# Altium PCB Transmitter.PcbDoc
Units mil, origin at the board's own origin, x right, y up, seen from the top; angles counter-clockwise.
Board outline 6000 x 4000 mil, 2 copper layers (Top Layer, Bottom Layer); 6 components, 6 nets, 61 pads, 0 vias.
Unrouted connection lines stored in the file: 1.
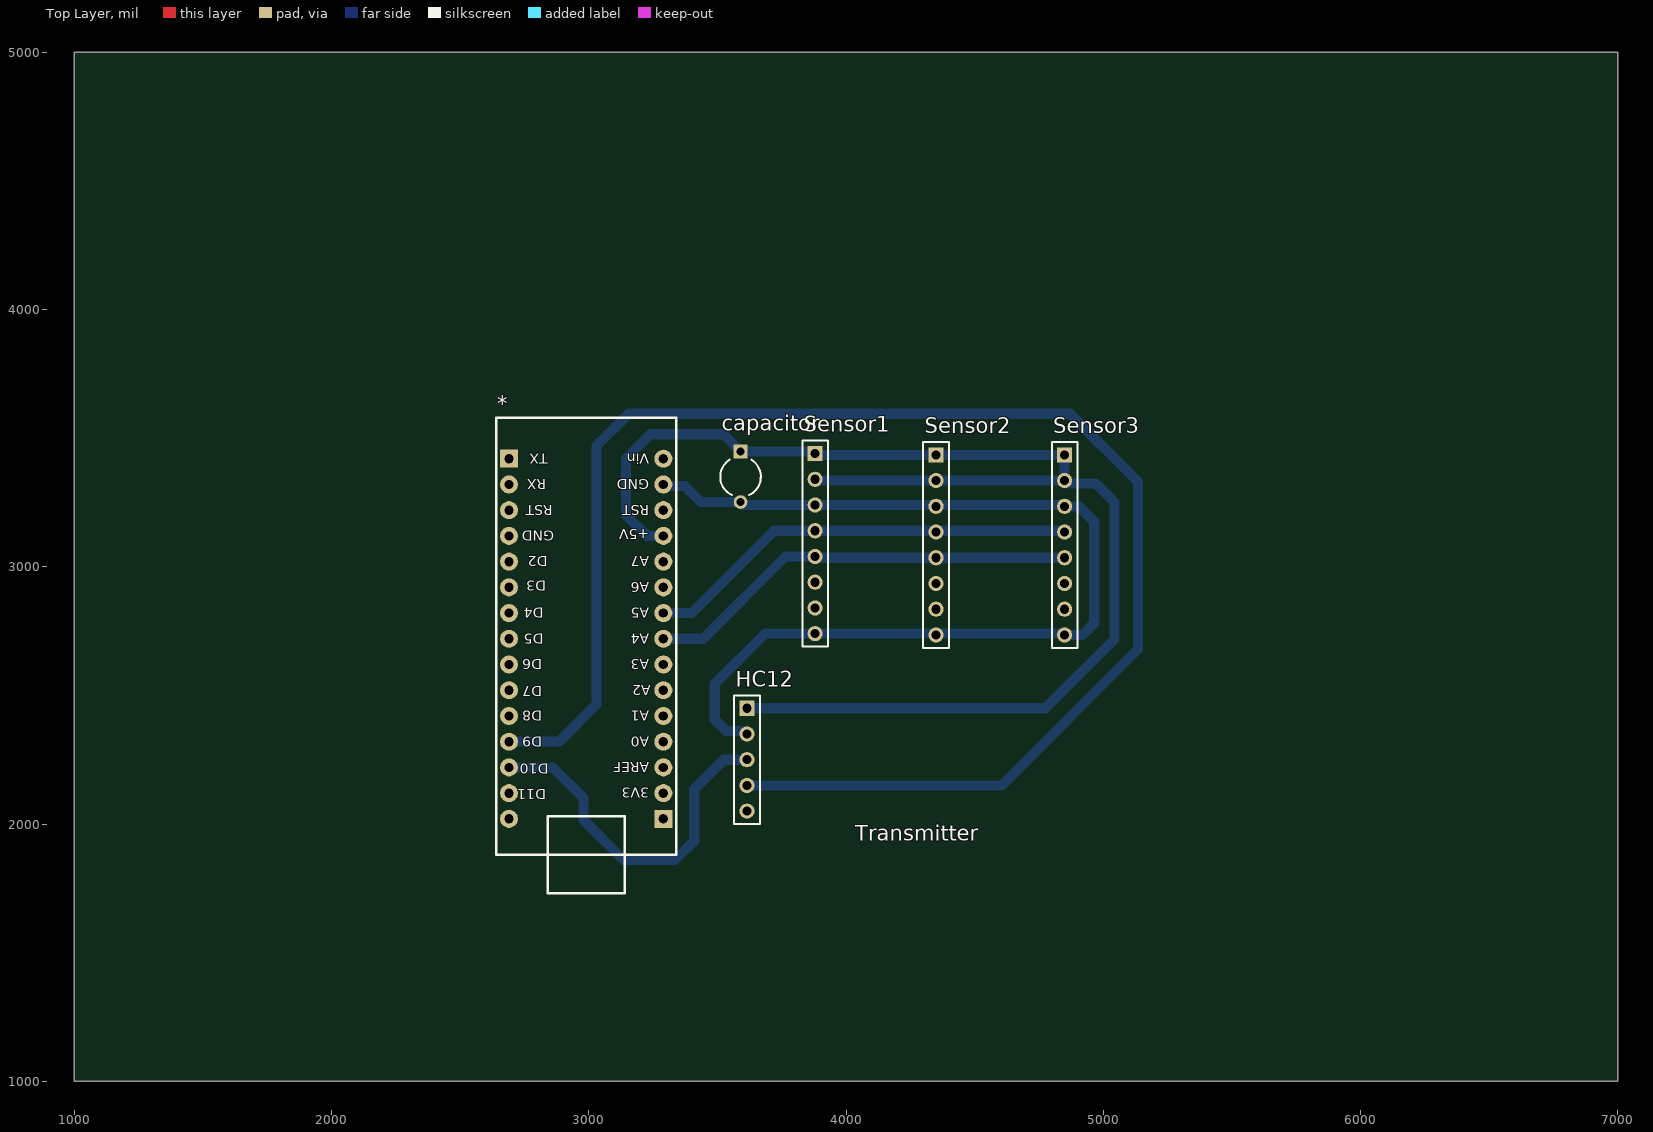
[diagram p0: Top Layer view]
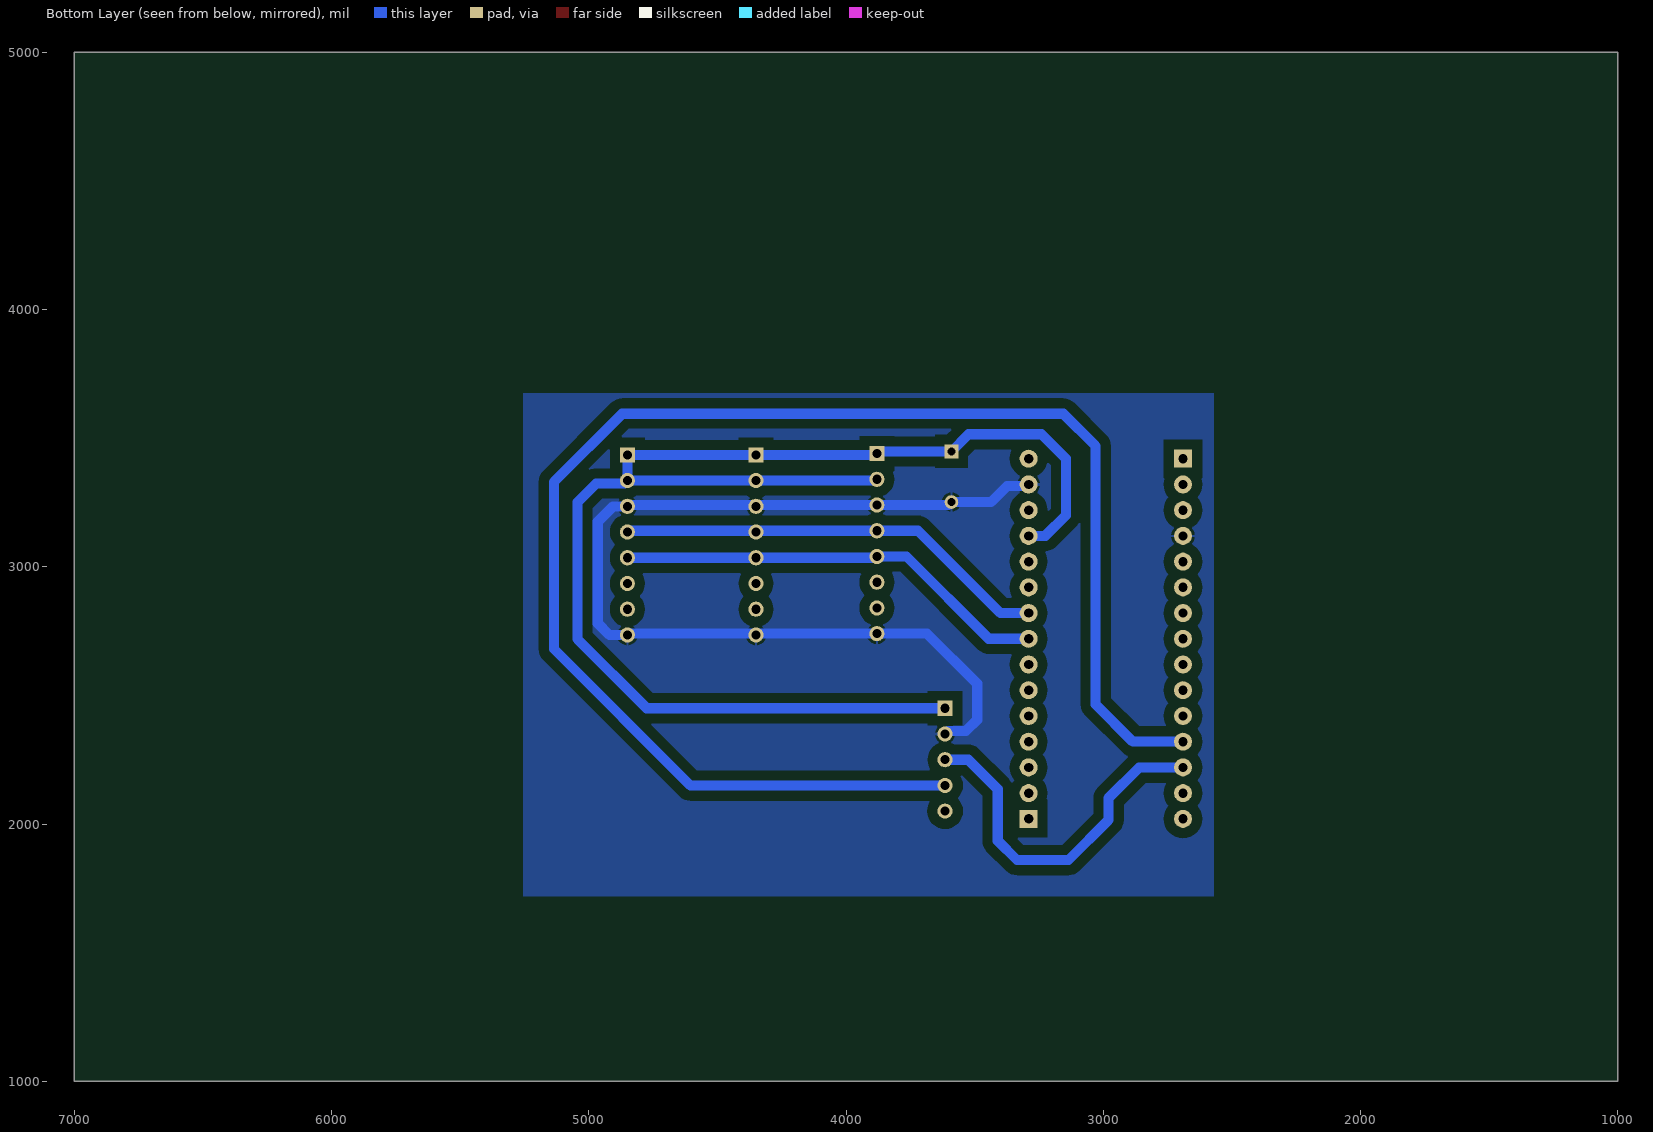
[diagram p1: Bottom Layer view, seen from below]

## Layer stack, top to bottom
Top Solder: solder mask 0.4, Solder Resist, Dk 3.5
Top Layer: signal copper 1.4
Dielectric 1: dielectric 12.6, FR-4, Dk 4.8
Bottom Layer: signal copper 1.4
Bottom Solder: solder mask 0.4, Solder Resist, Dk 3.5

## Board outline
1000,1000 7000,1000 7000,5000 1000,5000

## Design rules (kind name [scope] priority, off if disabled: settings)
Clearance [All] p1: gap=39.37
PolygonConnect [All] p1: connectstyle=Relief reliefconductorwidth=10 reliefentries=4 polygonreliefangle="90 Angle" airgapwidth=10
RoomDefinition Transmitter [InComponentClass('Transmitter')] p1: confinementstyle=ConfineIn formatcopy=TRUE lockcomponents=FALSE outline 2570,1720 5255,1720 5255,3675 2570,3675
RoutingVias [All] p1: holewidth=28 width=50 viastyle="Through Hole" minholewidth=28 minwidth=50 maxholewidth=28 maxwidth=50
SolderMaskExpansion [All] p1: expansion=4
UnpouredPolygon [All] p1: allowunpoured=FALSE
Width [All] p1: maxlimit=39.37 minlimit=39.37 preferedwidth=39.37
29 further rules are at their usual default settings.

## Components (designator, comment, footprint, x,y, rotation, side; value= is the part's Value field where it differs from the comment)
* "Nano" ArduinoNano 3290,2120 r90 top
capacitor "Cap2" CAPR5-4X5 3590,3350 r270 top
HC12 "Header 5" HDR1X5 3615,2450 r270 top
Sensor1 "Header 8" HDR1X8 3880,3440 r270 top
Sensor2 "Header 8" HDR1X8 4350,3435 r270 top
Sensor3 "Header 8" HDR1X8 4850,3435 r270 top

## Footprints (in the part's own frame and the unit in brackets; to place one, negate y for a bottom-side part, rotate by r counter-clockwise, add the part's x,y. Pads: shape width x height; smd on the part's side, far side on the other; paste and mask are expansions set on the pad)
ArduinoNano [mil]
  rect 70x70 hole 36: 0(-100,0) 15(1300,600)
  round 70 hole 36: 1(0,0) 2(100,0) 3(200,0) 4(300,0) 5(400,0) 6(500,0) 7(600,0) 8(700,0) 9(800,0) 10(900,0) 11(1000,0) 12(1100,0) 13(1200,0) 14(1300,0) 16(1200,600) 17(1100,600) 18(1000,600) 19(900,600) 20(800,600) 21(700,600) 22(600,600) 23(500,600) 24(400,600) 25(300,600) 26(200,600) 27(100,600) 28(0,600) 29(-100,600)
  silkscreen extent -390,-50 1460,650
CAPR5-4X5 [mm] "Capacitor; 2 Leads"
  rect 1.35x1.35 hole 0.8: 1(-2.5,0)
  round 1.35 hole 0.8: 2(2.5,0)
  silkscreen extent -1.69,-2 1.82,2
HDR1X5 [mm] "Connector; Header; 5 Position"
  rect 1.5x1.5 hole 0.9: 1(0,0)
  round 1.5 hole 0.9: 2(2.54,0) 3(5.08,0) 4(7.62,0) 5(10.16,0)
  silkscreen extent -1.27,-1.27 11.43,1.27
HDR1X8 [mm] "Connector; Header; 8 Position"
  rect 1.5x1.5 hole 0.9: 1(0,0)
  round 1.5 hole 0.9: 2(2.54,0) 3(5.08,0) 4(7.62,0) 5(10.16,0) 6(12.7,0) 7(15.24,0) 8(17.78,0)
  silkscreen extent -1.27,-1.27 19.05,1.27

## Part data
*: library part Component_1
capacitor: "Capacitor"
HC12: "Header, 5-Pin"
Sensor1 Sensor2 Sensor3: "Header, 8-Pin"

## Nets (pads, with @x,y where several pads share a name; then routed paths per layer and width w, separated by ;. In a path a pad name is that pad's centre, name@x,y a point inside that pad or via, vN(x,y) a via of type N, cw(c..) or ccw(c..) an arc to the next point about the centre after c; other vN are vias at no path point)
GND: *.13 *.18 capacitor.2 HC12.2 Sensor1.3 Sensor1.8 Sensor2.3 Sensor2.8 Sensor3.3 Sensor3.8 | length 3946.1
  Bottom Layer w39.37: *.13@3295.94,3314.06 3373.28,3314.06 3435.76,3251.57 capacitor.2 ; capacitor.2@3601.57,3240 Sensor1.3 4845,3240 Sensor3.3 4905,3235 4965,3175 4965,2780 4920,2735 Sensor3.8 ; HC12.2@3603.58,2361.42 3533.99,2361.42 3490,2405.4 3490,2545 3685,2740 Sensor1.8 Sensor3.8@4845,2740
RX: *.27 HC12.3 | length 1402.6
  Bottom Layer w39.37: *.27 2860,2220 2980,2100 2980,2015 3135,1860 3335,1860 3410,1935 3410,2135 3525,2250 HC12.3
SCL: *.8 Sensor1.4 Sensor2.4 Sensor3.4 | length 1694.6
  Bottom Layer w39.37: *.8 3400,2820 3720,3140 Sensor1.4 4845,3140 Sensor3.4
SDA: *.7 Sensor1.5 Sensor2.5 Sensor3.5 | length 1694.6
  Bottom Layer w39.37: *.7 3445,2720 3765,3040 Sensor1.5 3885,3035 Sensor2.5 Sensor3.5
TX: *.26 HC12.4 | length 6061.1
  Bottom Layer w39.37: *.26 2885,2320 3030,2465 3030,3470 3155,3595 4870,3595 5135,3330 5135,2680 4605,2150 HC12.4
VCC: *.11 capacitor.1 HC12.1 Sensor1.1 Sensor1.2 Sensor2.1 Sensor2.2 Sensor3.1 Sensor3.2 | length 5525.5
  Bottom Layer w39.37: *.11 3225,3120 3145,3200 3145,3420 3240,3515 3523.43,3515 capacitor.1 3871.57,3448.43 Sensor1.1 3885,3435 Sensor2.1 Sensor3.1 Sensor3.2 Sensor2.2 Sensor1.2@3885,3335 ; HC12.1 4775,2450 5043.74,2718.74 5043.74,3251.26 4971.42,3323.58 Sensor3.2@4861.42,3323.58
pads on no net: *.0 *.1 *.2 *.3 *.4 *.5 *.6 *.9 *.10 *.12 *.14 *.15 *.16 *.17 *.19 *.20 *.21 *.22 *.23 *.24 *.25 *.28 *.29 HC12.5 Sensor1.6 Sensor1.7 Sensor2.6 Sensor2.7 Sensor3.6 Sensor3.7

## Polygon pours and split planes (outlines as drawn)
GND on Bottom Layer "Bottom Layer-No Net" (solid, pour order 4): 2570,3675 2570,1720 5255,1720 5255,3675 2570,3675

## Silkscreen, mask and mechanical layers (free items; w line width, h text height)
Top Overlay:
  text "Transmitter" at 4035,1935 h60

## Text inside footprints (layer, text, board x,y; h text height)
*: Top Overlay "D11" at 2835,2135 h40 r180; Top Overlay "D10" at 2845,2235 h40 r180; Top Overlay "D9" at 2820,2340 h40 r180; Top Overlay "D8" at 2820,2440 h40 r180; Top Overlay "D7" at 2820,2535 h40 r180; Top Overlay "D6" at 2820,2640 h40 r180; Top Overlay "D5" at 2825,2740 h40 r180; Top Overlay "D4" at 2825,2840 h40 r180; Top Overlay "D3" at 2835,2945 h40 r180; Top Overlay "D2" at 2840,3040 h40 r180; Top Overlay "GND" at 2865,3140 h40 r180; Top Overlay "RST" at 2860,3240 h40 r180; Top Overlay "RX" at 2835,3340 h40 r180; Top Overlay "TX" at 2840,3440 h40 r180; Top Overlay "Vin" at 3235,3440 h40 r180; Top Overlay "GND" at 3235,3340 h40 r180; Top Overlay "RST" at 3235,3240 h40 r180; Top Overlay "+5V" at 3235,3145 h40 r180; Top Overlay "A7" at 3235,3040 h40 r180; Top Overlay "A6" at 3235,2940 h40 r180; Top Overlay "A5" at 3235,2840 h40 r180; Top Overlay "A4" at 3235,2740 h40 r180; Top Overlay "A3" at 3235,2640 h40 r180; Top Overlay "A2" at 3240,2540 h40 r180; Top Overlay "A1" at 3235,2440 h40 r180; Top Overlay "A0" at 3235,2340 h40 r180; Top Overlay "AREF" at 3235,2240 h40 r180; Top Overlay "3V3" at 3235,2140 h40 r180